# EAGLE board shield3 (EAGLE 7.3.0)
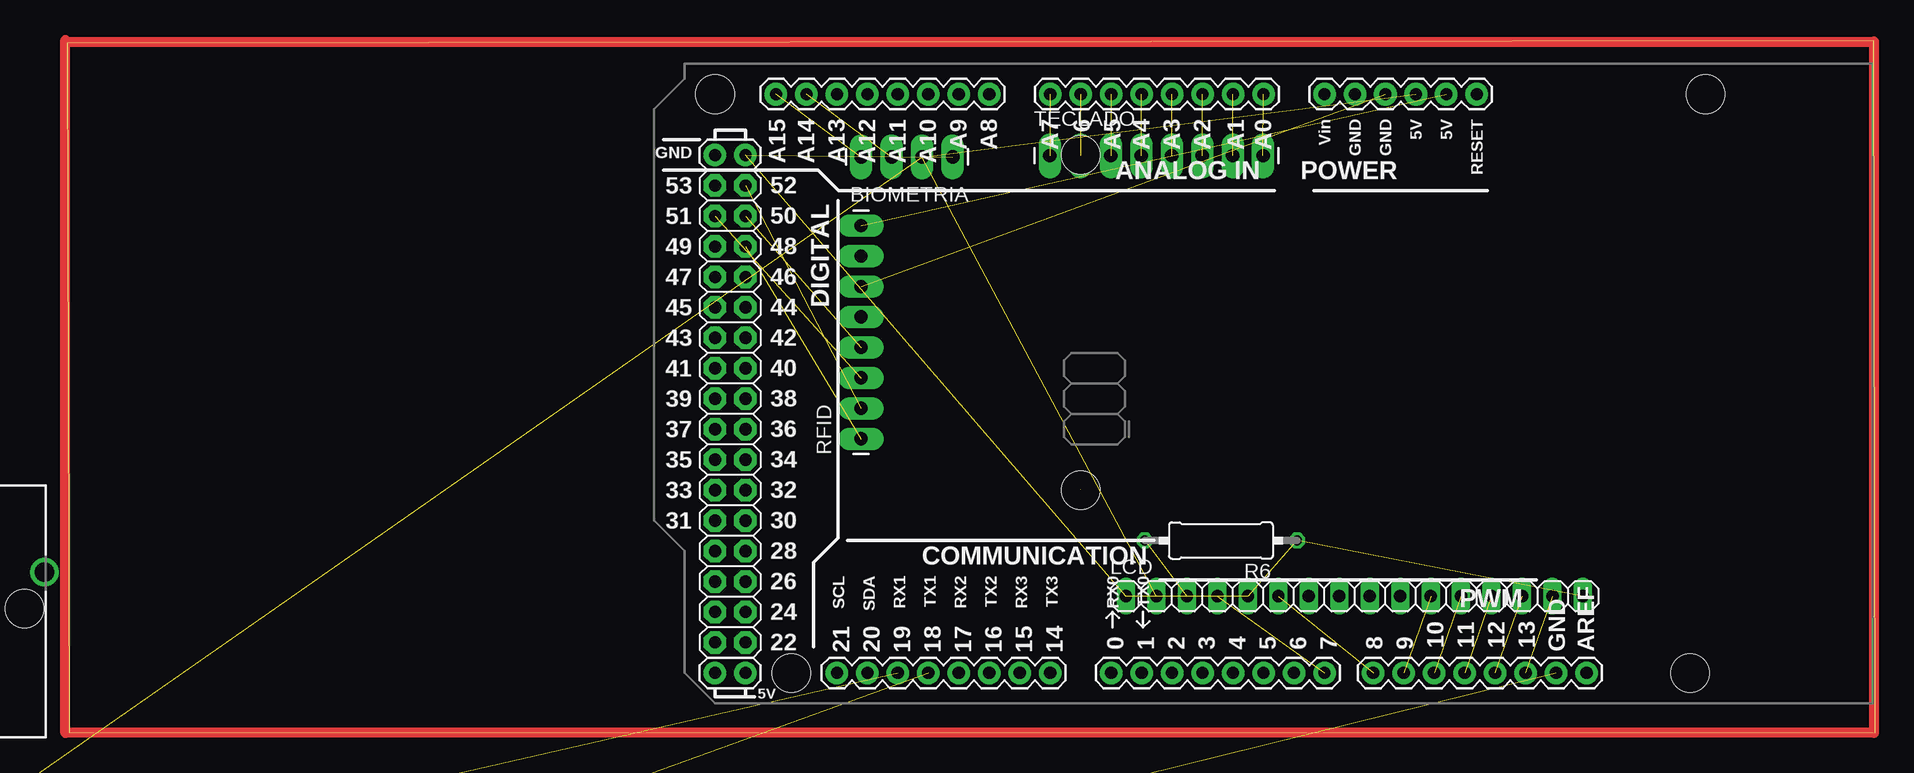
[diagram p0: board, top side]
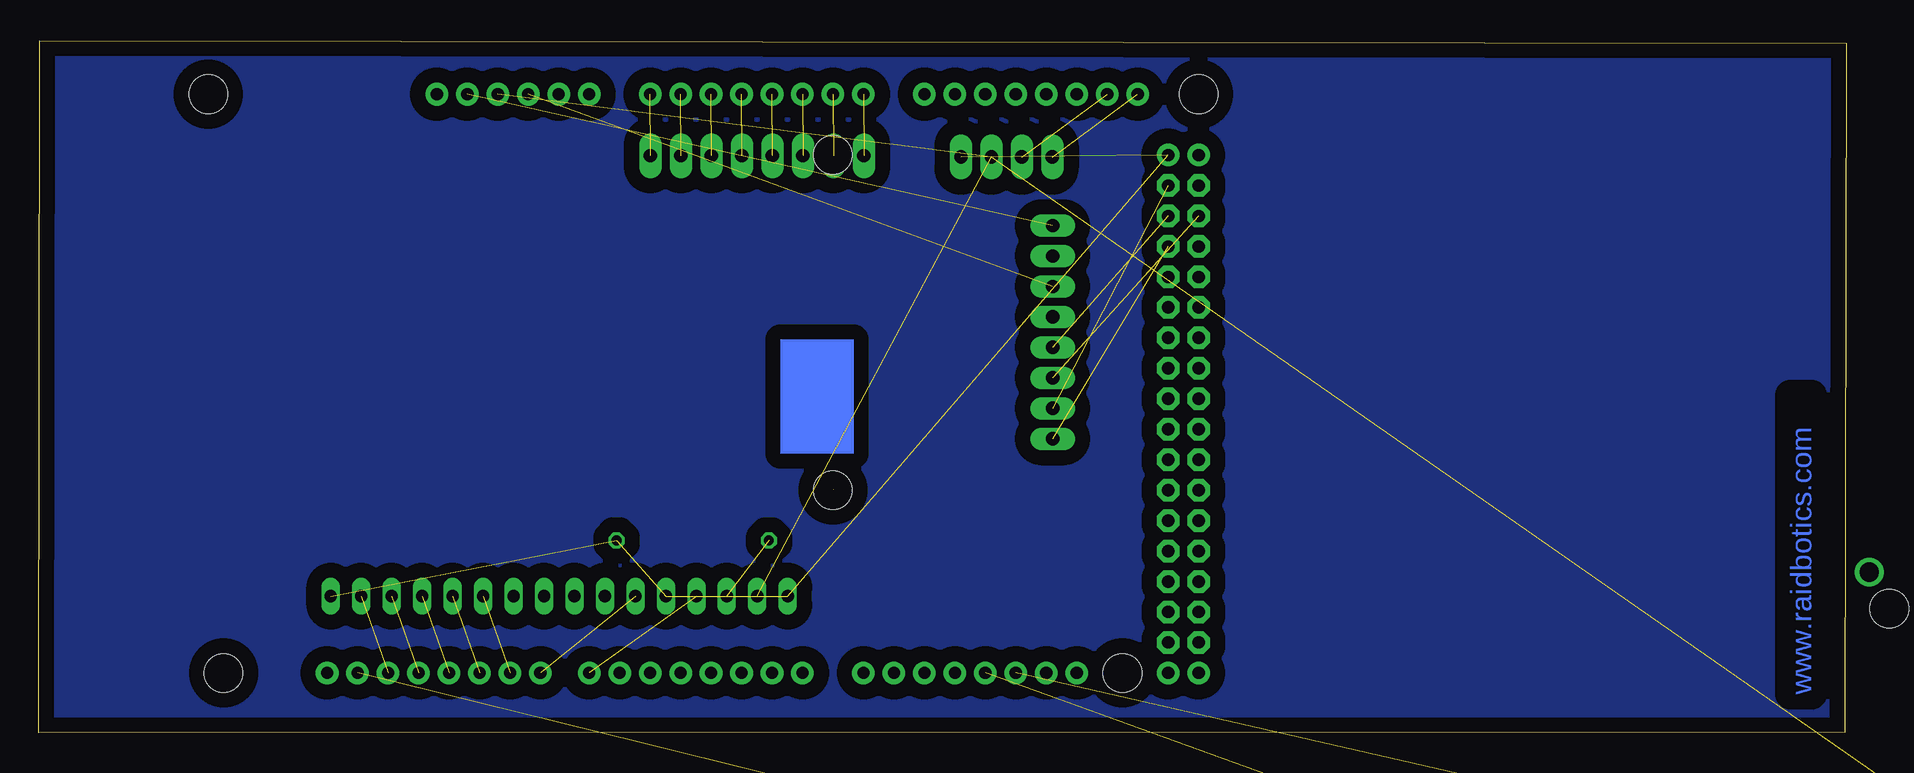
[diagram p1: board, bottom side, seen from below]

Size 150.7 x 57.7 mm. Coordinates in mm from the lower left corner, seen from the top.
Outline: 0.15,0.05 150.7,0 150.6,57.7 0,57.5 0.15,0.05
Copper layers (1*16): Top 0.035mm / dielectric 1.5mm / Bottom 0.035mm
Design rules "default": minimum track width 10mil, minimum drill 24mil, track to track 8mil, track to pad 8mil, pad to pad 8mil, via to via 8mil, smd to smd 8mil, copper to edge 40mil, drill to drill 8mil, minimum pad ring 10mil, minimum via ring 8mil, stop-mask expansion 4mil, vias tented up to drill 0mil, thermal gap 10mil

## Footprints (pad centres in the part's own frame; a part is rotated, then mirrored left to right if it is on the bottom)
1X04_LONGPADS = drill 1.118 pad 1.88 long: 1 0,0; 2 2.54,0; 3 5.08,0; 4 7.62,0
1X16 = drill 1.016 long: 1 -19.05,0; 2 -16.51,0; 3 -13.97,0; 4 -11.43,0; 5 -8.89,0; 6 -6.35,0; 7 -3.81,0; 8 -1.27,0; 9 1.27,0; 10 3.81,0; 11 6.35,0; 12 8.89,0; 13 11.43,0; 14 13.97,0; 15 16.51,0; 16 19.05,0
TO-92 = drill 0.813 pad 1.88: 1 -1.27,0; 2 0,1.905; 3 1.27,0
0204/7 = drill 0.813 octagon: 1 -3.81,0; 2 3.81,0
0309/12 = drill 0.813 octagon: 1 -6.35,0; 2 6.35,0
1X08_LONGPADS = drill 1.118 pad 1.88 long: 1 0,0; 2 2.54,0; 3 5.08,0; 4 7.62,0; 5 10.16,0; 6 12.7,0; 7 15.24,0; 8 17.78,0
ARDUINO_MEGA = drill 1.016 pad 1.88: 0 63.5,50.8; 1 60.96,50.8; 2 58.42,50.8; 3 55.88,50.8; 3.3V 35.56,2.54; 4 53.34,50.8; 5 50.8,50.8; 5V@0 38.1,2.54; 5V@1 93.98,50.8; 5V@2 96.52,50.8; 6 48.26,50.8; 7 45.72,50.8; 8 41.656,50.8; 9 39.116,50.8; 10 36.576,50.8; 11 34.036,50.8; 12 31.496,50.8; 13 28.956,50.8; 14 68.58,50.8; 15 71.12,50.8; 16 73.66,50.8; 17 76.2,50.8; 18 78.74,50.8; 19 81.28,50.8; 20 83.82,50.8; 21 86.36,50.8; A0 50.8,2.54; A1 53.34,2.54; A2 55.88,2.54; A3 58.42,2.54; A4 60.96,2.54; A5 63.5,2.54; A6 66.04,2.54; A7 68.58,2.54; A8 73.66,2.54; A9 76.2,2.54; A10 78.74,2.54; A11 81.28,2.54; A12 83.82,2.54; A13 86.36,2.54; A14 88.9,2.54; A15 91.44,2.54; AREF 23.876,50.8; GND@0 40.64,2.54; GND@1 43.18,2.54; GND@2 93.98,7.62; GND@3 96.52,7.62; GND@4 26.416,50.8; RESET 33.02,2.54; VIN 45.72,2.54 | drill 1.016 pad 1.88 octagon: 22 93.98,48.26; 23 96.52,48.26; 24 93.98,45.72; 25 96.52,45.72; 26 93.98,43.18; 27 96.52,43.18; 28 93.98,40.64; 29 96.52,40.64; 30 93.98,38.1; 31 96.52,38.1; 32 93.98,35.56; 33 96.52,35.56; 34 93.98,33.02; 35 96.52,33.02; 36 93.98,30.48; 37 96.52,30.48; 38 93.98,27.94; 39 96.52,27.94; 40 93.98,25.4; 41 96.52,25.4; 42 93.98,22.86; 43 96.52,22.86; 44 93.98,20.32; 45 96.52,20.32; 46 93.98,17.78; 47 96.52,17.78; 48 93.98,15.24; 49 96.52,15.24; 50 93.98,12.7; 51 96.52,12.7; 52 93.98,10.16; 53 96.52,10.16 | hole 3.2: 15.24,50.8; 13.97,2.54; 66.04,35.56; 66.04,7.62; 90.17,50.8; 96.52,2.54
XRJK-S-01-6-4-0-9M2 = drill 0.9 pad 1.5: 1 -1.905,6.35; 2 -0.635,8.89; 3 0.635,6.35; 4 1.905,8.89 | drill 1.6 pad 2.184: S1 -6.75,3.05; S2 6.75,3.05 | hole 3.2: -5.08,0; 5.08,0

## Placement (x,y rotation side)
BIOMETRIA  [1X04_LONGPADS]  73.81,48.02 180 top
LCD  [1X16]  107.3,11.4 0 top
Q1  MOSFET-NCHANNEL2N7000  [TO-92]  -13.9,-3.45 0 top  (outside the outline)
Q2  MOSFET-NCHANNEL2N7000  [TO-92]  -13.9,-8.2 0 top  (outside the outline)
R1  10k  [0204/7]  -11.85,-12.6 0 top  (outside the outline)
R2  10k  [0204/7]  -11.85,-35.1 0 top  (outside the outline)
R3  4.7k  [0204/7]  -11.85,-20.1 0 top  (outside the outline)
R4  10k  [0204/7]  -11.85,-23.85 0 top  (outside the outline)
R5  10k  [0204/7]  -11.85,-27.6 0 top  (outside the outline)
R6  [0309/12]  96.17,16.04 180 top
R7  4.7k  [0204/7]  -11.85,-31.35 0 top  (outside the outline)
RFID  [1X08_LONGPADS]  66.17,24.52 90 top
TECLADO  [1X08_LONGPADS]  81.91,48.13 0 top
U1  ARDUINO-MEGAFULL  [ARDUINO_MEGA]  150.52,55.8 180 top
X1  XRJK-S-01-6-4-0-9M2  [XRJK-S-01-6-4-0-9M2]  -8.65,10.35 0 top

## Library data of the parts
BIOMETRIA RFID TECLADO = SparkFun-Connectors
LCD = pinhead
Q1 Q2 = SparkFun-DiscreteSemi
R1-R7 = resistor
U1 = SparkFun-Boards
X1 = con-xmultiple

## Nets
5V: BIOMETRIA.2 LCD.2 R1.1 R3.1 R4.1 R7.1 U1.5V@0
7: LCD.4 U1.7
8: LCD.6 U1.8
9: LCD.11 U1.9
10: LCD.12 U1.10
11: LCD.13 U1.11
12: LCD.14 U1.12
13: LCD.15 U1.13
21: U1.21
22: U1.22
24: U1.24
25: U1.25
26: U1.26
27: U1.27
28: U1.28
29: U1.29
30: U1.30
31: U1.31
32: U1.32
33: U1.33
34: U1.34
36: U1.36
38: U1.38
39: U1.39
40: U1.40
41: U1.41
42: U1.42
43: U1.43
44: U1.44
A0: TECLADO.8 U1.A0
A1: TECLADO.7 U1.A1
A2: TECLADO.6 U1.A2
A3: TECLADO.5 U1.A3
A4: TECLADO.4 U1.A4
A5: TECLADO.3 U1.A5
A6: TECLADO.2 U1.A6
A7: TECLADO.1 U1.A7
A14: BIOMETRIA.3 U1.A14
A15: BIOMETRIA.4 U1.A15
GND: R2.2 R5.2 U1.GND@4
GND1: RFID.6 U1.GND@0
N$1: Q1.2 R2.1 R3.2
N$2: Q2.2 R5.1 R7.2
N$3: LCD.3 R6.2
N$6: RFID.8 U1.3.3V
N$11: BIOMETRIA.1 LCD.1 LCD.5 LCD.16 R6.1 U1.GND@2
N$22: U1.23
N$31: U1.20
N$42: U1.37
N$65: RFID.1 U1.48
RX: Q2.1
RX1: Q1.3 R1.2 U1.19
SCK: RFID.2 U1.52
SI: RFID.3 U1.51
SO: RFID.4 U1.50
TX: Q1.1
TX1: Q2.3 R4.2 U1.18

## Tracks (layer width: path | path; a pad name or v marks a point on that pad's centre or on a via)
5V  (6 unrouted)
7  (1 unrouted)
8  (1 unrouted)
9  (1 unrouted)
10  (1 unrouted)
11  (1 unrouted)
12  (1 unrouted)
13  (1 unrouted)
A0  (1 unrouted)
A1  (1 unrouted)
A2  (1 unrouted)
A3  (1 unrouted)
A4  (1 unrouted)
A5  (1 unrouted)
A6  (1 unrouted)
A7  (1 unrouted)
A14  (1 unrouted)
A15  (1 unrouted)
GND  (2 unrouted)
GND1  (1 unrouted)
N$1  (2 unrouted)
N$2  (2 unrouted)
N$3  (1 unrouted)
N$6  (1 unrouted)
N$11  (5 unrouted)
N$16  (via drill 0.5 pad 2.54)
  other vias: 135.25,5
N$58  (via drill 0.5 pad 2.54)
  other vias: 60.35,5
N$59  (1 unrouted)
N$65  (1 unrouted)
N$78
  pour Bottom (isolate 1.27): 0.05,57.55 150.65,57.55 150.65,-0.3 0,-0.25
N$79
  Top 0.813: -0.15,57.65 150.6,57.65 150.6,0 -0.15,0 -0.15,57.8
N$81  (via drill 0.5 pad 2.54)
  other vias: 54.05,53.3
N$96  (via drill 0.5 pad 2.54)
  other vias: 136.55,53.3
RX1  (2 unrouted)
SCK  (1 unrouted)
SI  (1 unrouted)
SO  (1 unrouted)
TX1  (2 unrouted)
(copper drawn outside any net)
  shapes: Bottom area x1

## Text on the board
Bottom: www.raidbotics.com